# Altium PCB ServoSurucuPCB.PcbDoc
Units mm, origin at the board's own origin, x right, y up, seen from the top; angles counter-clockwise.
Board outline 50.16 x 61.72 mm, 2 copper layers (Top Layer, Bottom Layer); 32 components, 19 nets, 84 pads, 0 vias.
Unrouted connection lines stored in the file: 6.
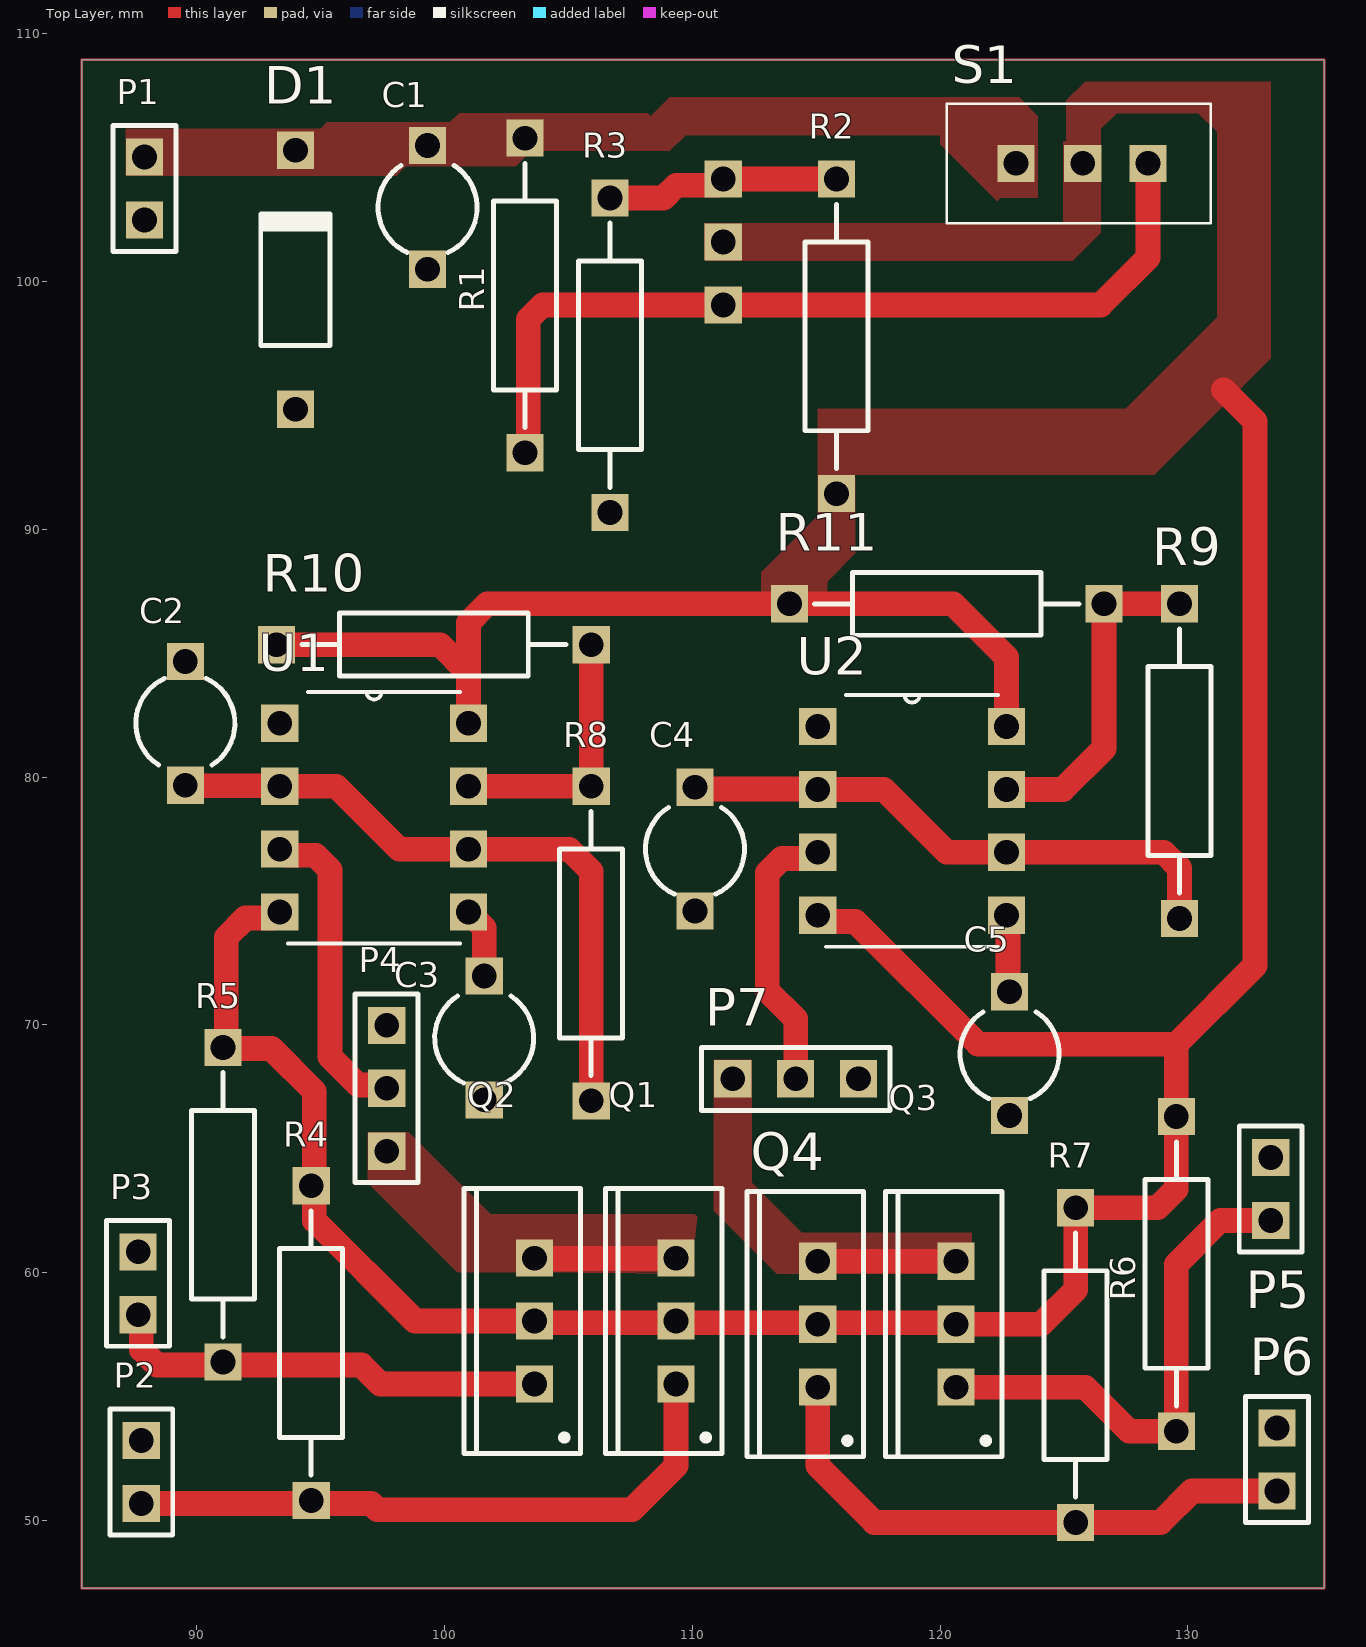
[diagram p0: Top Layer view]
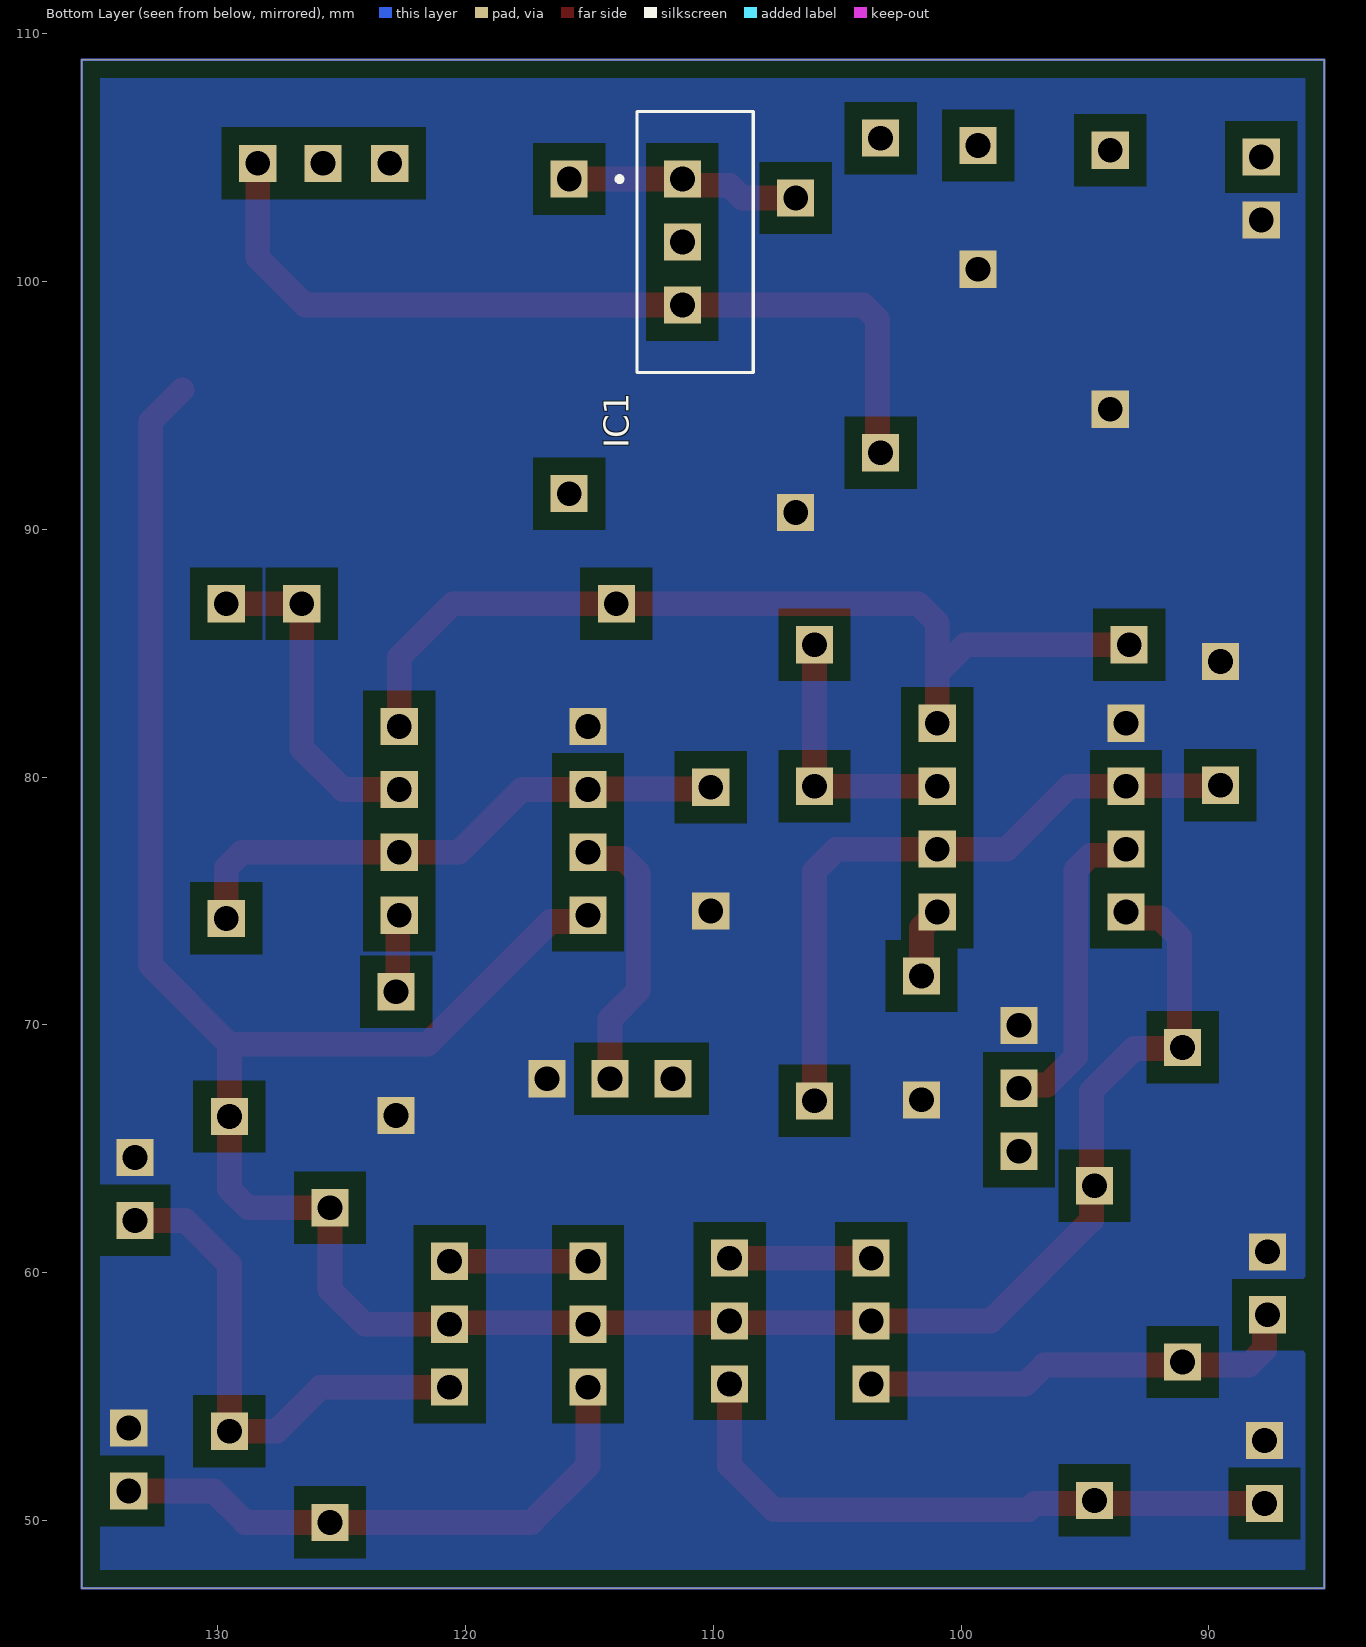
[diagram p1: Bottom Layer view, seen from below]

## Layer stack, top to bottom
Top Solder: solder mask 0.0102, Solder Resist, Dk 3.5
Top Layer: signal copper 0.0356
Dielectric 1: dielectric 0.32, FR-4, Dk 4.8
Bottom Layer: signal copper 0.0356
Bottom Solder: solder mask 0.0102, Solder Resist, Dk 3.5

## Board outline
85.344,47.244 135.509,47.244 135.509,108.966 85.344,108.966

## Design rules (kind name [scope] priority, off if disabled: settings)
Clearance [All] p1: gap=0.152 ignorepadtopadclearanceinfootprint=TRUE except(0.7: Arc-Fill Arc-Poly Arc-Region Track-Fill Track-Poly Track-Region SMDPad-Fill SMDPad-Poly SMDPad-Region THPad-Fill THPad-Poly THPad-Region Via-Fill Via-Poly Via-Region Fill-Fill Fill-Poly Fill-Region Poly-Poly Poly-Region Region-Region)
PolygonConnect [All] p1: connectstyle=Direct reliefconductorwidth=0.254 reliefentries=4 polygonreliefangle="90 Angle" airgapwidth=0.254
RoomDefinition U_pwmIC [InComponentClass('U_pwmIC')] p1: confinementstyle=ConfineIn formatcopy=TRUE lockcomponents=FALSE outline 82.169,60.579 135.509,60.579 135.509,109.601 82.169,109.601
RoomDefinition U_optoControl [InComponentClass('U_optoControl')] p2: confinementstyle=ConfineIn formatcopy=TRUE lockcomponents=FALSE outline 81.788,60.833 135.89,60.833 135.89,109.474 81.788,109.474
RoomDefinition ServoSurucuSematik [InComponentClass('ServoSurucuSematik')] p3: confinementstyle=ConfineIn formatcopy=TRUE lockcomponents=FALSE outline 82.804,60.579 135.382,60.579 135.382,109.474 82.804,109.474
RoutingVias [All] p1: holewidth=0.3 width=0.6 viastyle="Through Hole" minholewidth=0.3 minwidth=0.6 maxholewidth=0.6 maxwidth=1
SolderMaskExpansion [All] p1: expansion=0.102 istentingtop=FALSE
Width [All] p1: maxlimit=1.5 minlimit=0.381 preferedwidth=0.5
30 further rules are at their usual default settings.

## Classes and differential pairs
component class U_pwmIC: C2 C3 C4 C5 R8 R9 R10 R11 U1 U2
component class ServoSurucuSematik: C1 D1 IC1 P1 R1 R2 R3 S1
component class U_optoControl: P2 P3 P4 P5 P6 P7 Q1 Q2 Q3 Q4 R4 R5 R6 R7

## Components (designator, comment, footprint, x,y, rotation, side; value= is the part's Value field where it differs from the comment)
C1 "Cap2" CAPR5-4X5 99.314,102.997 r270 top value=100pF
C2 "Cap2" CAPR5-4X5 89.535,82.169 r90 top value=100pF
C3 "Cap2" CAPR5-4X5 101.6,69.469 r270 top value=100pF
C4 "Cap2" CAPR5-4X5 110.109,77.089 r270 top value=100pF
C5 "Cap2" CAPR5-4X5 122.809,68.834 r270 top value=100pF
D1 "Diode 1N4007" DO-41 93.98,100.076 r90 top
IC1 "LM317T" LM317 111.252,101.6 r270 bottom
P1 "Input" HDR1X2 87.884,105.029 r270 top
P2 "TETİKLEME" HDR1X2 87.757,50.673 r90 top
P3 "TETİKLEME" HDR1X2 87.63,58.293 r90 top
P4 "Header 3" HDR1X3 97.663,64.897 r90 top
P5 "TETİKLEME" HDR1X2 133.35,62.103 r90 top
P6 "TETİKLEME" HDR1X2 133.604,51.181 r90 top
P7 "Header 3" HDR1X3 111.633,67.818 r0 top
Q1 "NMOS-2" TO-220AB 109.347,58.039 r90 top
Q2 "NMOS-2" TO-220AB 103.632,58.039 r90 top
Q3 "NMOS-2" TO-220AB 120.65,57.912 r90 top
Q4 "NMOS-2" TO-220AB 115.062,57.912 r90 top
R1 "Res Semi" AXIAL-0.5 103.251,99.441 r90 top value=10
R2 "Res Semi" AXIAL-0.5 115.824,97.79 r90 top value=240
R3 "Res Semi" AXIAL-0.5 106.68,97.028 r270 top value=1k
R4 "Res Semi" AXIAL-0.5 94.615,57.15 r90 top value=3K
R5 "Res Semi" AXIAL-0.5 91.059,62.738 r90 top value=3K
R6 "Res Semi" AXIAL-0.5 129.54,59.944 r90 top value=3K
R7 "Res Semi" AXIAL-0.5 125.476,56.261 r90 top value=3K
R8 "Res Semi" AXIAL-0.5 105.918,73.279 r90 top value=10K
R9 "Res Semi" AXIAL-0.5 129.667,80.645 r90 top value=10K
R10 "Res Semi" AXIAL-0.5 99.568,85.344 r0 top value=1K
R11 "Res Semi" AXIAL-0.5 120.269,86.995 r0 top value=1K
S1 "BD240C" BD240C 126.365,104.394 r180 top
U1 "NE555N" "NE555 -T" 100.965,74.549 r0 top
U2 "NE555N" "NE555 -T" 122.682,74.422 r0 top

## Footprints (in the part's own frame and the unit in brackets; to place one, negate y for a bottom-side part, rotate by r counter-clockwise, add the part's x,y. Pads: shape width x height; smd on the part's side, far side on the other; paste and mask are expansions set on the pad)
AXIAL-0.5 [mm] "Axial Device, Thru-Hole; 2 Leads; 0.5 in Pin Spacing"
  rect 1.5x1.5 hole 1: 1(-6.35,0) 2(6.35,0)
  silkscreen extent -5.33,-1.27 5.33,1.27
BD240C [mm] "TO 220"
  rect 1.5x1.5 hole 1: 1(-2.032,-0.381) 2(0.602,-0.381) 3(3.302,-0.381)
  silkscreen extent -4.57,-2.79 6.1,2.04
CAPR5-4X5 [mm] "Capacitor; 2 Leads"
  rect 1.5x1.5 hole 1: 1(-2.5,0) 2(2.5,0)
  silkscreen extent -1.69,-2 1.82,2
DO-41 [mm] "Diode, Axial; Body 5.2 x 2.7 mm (LxDia. max), Lead Dia. 0.86 mm (max)"
  rect 1.5x1.5 hole 1: 1(-5.23,0) 2(5.23,0)
  silkscreen extent -2.65,-1.4 2.75,1.4
HDR1X2 [mm] "Connector; Header; 2 Position"
  rect 1.5x1.5 hole 1: 1(0,0) 2(2.54,0)
  silkscreen extent -1.27,-1.27 3.81,1.27
HDR1X3 [mm] "Connector; Header; 3 Position"
  rect 1.5x1.5 hole 1: 1(0,0) 2(2.54,0) 3(5.08,0)
  silkscreen extent -1.27,-1.27 6.35,1.27
LM317 [mm] "1.5A ADJ LINEAR REGULATOR"
  rect 1.5x1.5 hole 1: 1(-2.54,0) 2(0,0) 3(2.54,0)
  silkscreen extent -5.27,-2.64 5.27,2.86
"NE555 -T" [mm]
  rect 1.5x1.5 hole 1: 1(-7.62,7.62) 2(-7.62,5.08) 3(-7.62,2.54) 4(-7.62,0) 5(0,0) 6(0,2.54) 7(0,5.08) 8(0,7.62)
  silkscreen extent -7.29,-1.27 -0.33,8.89
TO-220AB [mm] "TO, Thru-Hole, Vertical, Heatsink Mounted; 3 In-Line Leads; Pitch 2.54 mm"
  rect 1.5x1.5 hole 1: 1(-2.54,0) 2(0,0) 3(2.54,0)
  silkscreen extent -5.35,-1.85 5.35,2.85, body extent -5.4,-1.9 5.4,2.9, height 19.3

## Part data
C1 C2 C3 C4 C5: "Capacitor", PackageDescription="Capacitor; 2 Leads", PackageReference=CAPR5-4X5, Published=23-Sep-2002, Publisher="Altium Limited"
D1: "1 Amp General Purpose Rectifier", Code_JEDEC=DO-204-AL, ComponentLink1Description="Manufacturer Link", ComponentLink1URL=http://www.fairchildsemi.com/, ComponentLink2Description=Datasheet, ComponentLink2URL=http://www.fairchildsemi.com/ds/1N%2F1N4001.pdf, DatasheetVersion=1998, LatestRevisionDate=17-Jul-2002, LatestRevisionNote="Re-released for DXP Platform.", PackageDescription="Diode, Axial; Body 5.2 x 2.7 mm (LxDia. max), Lead Dia. 0.86 mm (max)", PackageReference=DO-41, PackageVersion=Aug-1999, Published=8-Jun-2000, Publisher="Altium Limited"
IC1: "1.5-A, 40-V, adjustable linear voltage regulator 3-TO-220", Package="TO-220-3 Texas Instruments", Arrow_Electronics-Purchase-URL=https://snapeda.com/shop?store=Arrow+Electronics&id=2756289, Availability=Unavailable, DigiKey-Purchase-URL=https://snapeda.com/shop?store=DigiKey&id=2756289, MF="Texas Instruments", Mouser-Purchase-URL=https://snapeda.com/shop?store=Mouser&id=2756289, MP=LM317T, Price=None, SnapEDA_Link=https://www.snapeda.com/parts/LM317T/Texas%20Instruments/view-part/2756289/?ref=snap
P1 P2 P3 P5 P6: library part "Header 2", "Header, 2-Pin", LatestRevisionDate=17-Jul-2002, LatestRevisionNote="Re-released for DXP Platform.", Publisher="Altium Limited"
P4 P7: "Header, 3-Pin", LatestRevisionDate=17-Jul-2002, LatestRevisionNote="Re-released for DXP Platform.", Publisher="Altium Limited"
Q1 Q2 Q3 Q4: "N-Channel Power MOSFET", ComponentLink1Description="Manufacturer Link", ComponentLink1URL=http://www.irf.com/, DatasheetVersion=PD-9.814, LatestRevisionDate=17-Jul-2002, LatestRevisionNote="Re-released for DXP Platform.", Note="Pin 2 is electrically connected to pin 4.", PackageDescription="TO, Thru-Hole, Vertical, Heatsink Mounted; 3 In-Line Leads; Pitch 2.54 mm", PackageReference=TO-220AB, PackageVersion=Feb-1997, Published=8-Jun-2000, Publisher="Altium Limited"
R1 R2 R3 R4 R5 R6 R7 R8 R9 R10 R11: "Semiconductor Resistor", LatestRevisionDate=17-Jul-2002, LatestRevisionNote="Re-released for DXP Platform.", PackageDescription="Axial Device, Thru-Hole; 2 Leads; 0.5 in Pin Spacing", PackageReference=AXIAL-0.5, Published=8-Jun-2000, Publisher="Altium Limited"
S1: "TO 220"
U1 U2: "555 Type, Timer/Oscillator _Single_ IC 8-DIP", Package="DIP-8 Texas Instruments", Availability=Unavailable, MF="ON Semiconductor", MP=NE555N, Price=None, SnapEDA_Link=https://www.snapeda.com/parts/NE555N/ON%20Semiconductor/view-part/2757993/?ref=snap

## Nets (pads, with @x,y where several pads share a name; then routed paths per layer and width w, separated by ;. In a path a pad name is that pad's centre, name@x,y a point inside that pad or via, vN(x,y) a via of type N, cw(c..) or ccw(c..) an arc to the next point about the centre after c; other vN are vias at no path point)
+6.5: IC1.2 Q1.2 Q2.2 Q3.2 Q4.2 R2.1 R4.2 R5.2 R6.2 R7.2 R10.1 R11.1 S1.2 U1.4 U1.8 U2.4 U2.8 | length 145.8
  Top Layer w1: R5.2 91.186,69.215 91.186,73.533 91.963,74.31 93.106,74.31 U1.4 ; R5.2@91.44,69.088 91.489,69.039 93.013,69.039 94.742,67.31 94.742,62.103 98.806,58.039 Q2.2 103.695,57.975 120.587,57.975 Q3.2 124.079,57.912 125.476,59.309 R7.2 128.778,62.611 129.54,63.373 R6.2 129.54,69.215 ; R10.1 99.822,85.344 100.965,84.201 ; U1.8 100.965,84.201 ; U2.4 115.312,74.172 116.582,74.172 121.539,69.215 129.54,69.215 ; U2.8 122.682,84.836 120.523,86.995 R11.1 101.727,86.995 100.965,86.233 100.965,84.201 ; 131.445,95.631 132.715,94.361 132.715,72.39 129.54,69.215
NetC2_1: C2.1 R8.1 U1.2 U1.6 | length 27.1
  Top Layer w1: C2.1 89.555,79.649 93.325,79.649 U1.2 95.631,79.629 98.171,77.089 U1.6 105.029,77.089 105.918,76.2 R8.1
NetC3_1: C3.1 U1.5 | length 2.8
  Top Layer w1: U1.5 101.6,73.914 C3.1
NetC4_1: C4.1 R9.1 U2.2 U2.6 | length 22.9
  Top Layer w1: C4.1@110.109,79.522 115.042,79.522 U2.2 117.729,79.502 120.269,76.962 U2.6 129.032,76.962 129.667,76.327 R9.1
NetC5_1: C5.1 U2.5 | length 3.1
  Top Layer w1: U2.5 122.746,74.358 122.746,71.398 C5.1
NetP4_1: P4.1 Q1.3 Q2.3 | length 5.7
  Top Layer w1: Q2.3 Q1.3
NetP4_2: P4.2 U1.3 | length 12.7
  Top Layer w1: U1.3 93.595,76.839 94.787,76.839 95.373,76.253 95.373,68.711 96.52,67.564 97.536,67.564 P4.2
NetP7_1: P7.1 Q3.3 Q4.3 | length 5.6
  Top Layer w1: Q4.3 Q3.3
NetP7_2: P7.2 U2.3 | length 11.4
  Top Layer w1: P7.2 114.173,70.231 113.03,71.374 113.03,76.126 113.616,76.712 114.812,76.712 114.812,76.962 114.935,76.839 114.935,76.835 U2.3
NetR1_1: IC1.3 R1.1 S1.1 | length 35.4
  Top Layer w1: R1.1@103.378,92.973 103.378,98.474 103.964,99.06 126.492,99.06 128.397,100.965 S1.1
NetR2_2: IC1.1 R2.2 R3.1 | length 9.5
  Top Layer w1: R3.1 108.839,103.378 109.351,103.89 111.002,103.89 IC1.1 R2.2
NetR8_2: R8.2 R10.2 U1.7 | length 10.7
  Top Layer w1: U1.7 R8.2 R10.2
NetR9_2: R9.2 R11.2 U2.7 | length 13.6
  Top Layer w1: U2.7@122.745,79.566 U2.7 124.968,79.502 126.619,81.153 R11.2 R9.2
optoCollector1: P3.1 Q2.1 R5.1 | length 18.2
  Top Layer w1: P3.1 87.757,58.42 87.757,56.896 88.392,56.261 91.44,56.261 93.599,56.261 96.647,56.261 97.409,55.499 Q2.1
optoCollector2: P2.1 Q1.1 R4.1 | length 25.7
  Top Layer w1: P2.1 94.869,50.673 97.028,50.673 97.282,50.419 107.569,50.419 109.347,52.197 Q1.1
optoCollector3: P6.1 Q4.1 R7.1 | length 23.2
  Top Layer w1: Q4.1 115.062,52.197 117.348,49.911 R7.1 128.905,49.911 130.175,51.181 P6.1
optoCollector4: P5.1 Q3.1 R6.1 | length 20.9
  Top Layer w1: Q3.1 125.857,55.372 127.635,53.594 R6.1 129.54,60.325 131.318,62.103 P5.1
optoEmiter1: C1.2 C2.2 C3.2 C4.2 C5.2 D1.1 P1.2 P2.2 P3.2 P4.3 P5.2 P6.2 P7.3 R3.2 U1.1 U2.1
VCC: C1.1 D1.2 P1.1 R1.2 S1.3

## Polygon pours and split planes (outlines as drawn)
NetP4_1 on Top Layer "NONET_L-01_P-001" (solid, pour order 6): 110.109,61.341 110.045,61.277 110.045,60.008 100.52,60.008 96.901,63.627 96.901,65.659 98.552,65.659 101.854,62.357 110.109,62.357 110.236,62.484
no net on Top Layer "NONET_L-01_P-001" (solid, pour order 5): 110.109,59.944 109.982,60.071 103.124,60.071
NetP7_1 on Top Layer "NONET_L-01_P-001" (solid, pour order 4): 121.285,59.817 121.158,59.944 113.411,59.944 110.871,62.484 110.871,68.58 112.395,68.58 112.395,63.627 114.427,61.595 121.285,61.595
+6.5 on Top Layer "NONET_L-01_P-001" (solid, pour order 3): 115.062,92.075 116.586,92.075 116.586,89.027 115.443,87.884 115.443,86.868 112.903,86.868 112.776,86.995 112.776,88.265 115.062,90.551 115.062,94.869 127.508,94.869 131.191,98.552 131.191,106.045 130.429,106.807 127.127,106.807 126.492,106.172 126.492,105.664 124.968,105.664 125.095,105.791 125.095,107.315 125.857,108.077 133.35,108.077 133.35,96.901 128.651,92.202 116.713,92.202
+6.5 on Top Layer "NONET_L-01_P-001" (solid, pour order 2): 124.968,105.664 126.492,105.664 126.492,101.981 125.349,100.838 110.617,100.838 110.49,100.711 110.49,102.362 124.968,102.362
VCC on Top Layer "NONET_L-01_P-001" (solid, pour order 1): 123.952,103.378 122.428,103.378 122.301,103.251 120.015,105.537 120.015,105.918 109.728,105.918 109.093,105.283 108.331,105.283 108.331,106.68 109.093,107.442 123.19,107.442 123.952,106.68
VCC on Top Layer "NONET_L-01_P-001" (solid, pour order 0): 87.122,104.267 98.044,104.267 98.425,104.648 102.87,104.648 103.505,105.283 108.331,105.283 108.331,106.68 108.204,106.807 100.584,106.807 100.203,106.426 95.25,106.426 94.996,106.172 87.122,106.172
optoEmiter1 on Bottom Layer "NONET_L-01_P-001" (solid, remove dead copper, pour order 7): 85.344,47.244 135.509,47.244 135.509,108.966 85.344,108.966

## Other copper
Multi-Layer:
  the board outline again, w0.1